# Altium PCB CL-KB-V1.2.pcbdoc (part 3 of 3)
Units mil, origin at the board's own origin, x right, y up, seen from the top; angles counter-clockwise.
Board outline 3269.95 x 5989.25 mil, 2 copper layers (Top Layer, Bottom Layer); 76 components, 86 nets, 398 pads, 855 vias.
Unrouted connection lines stored in the file: 1.
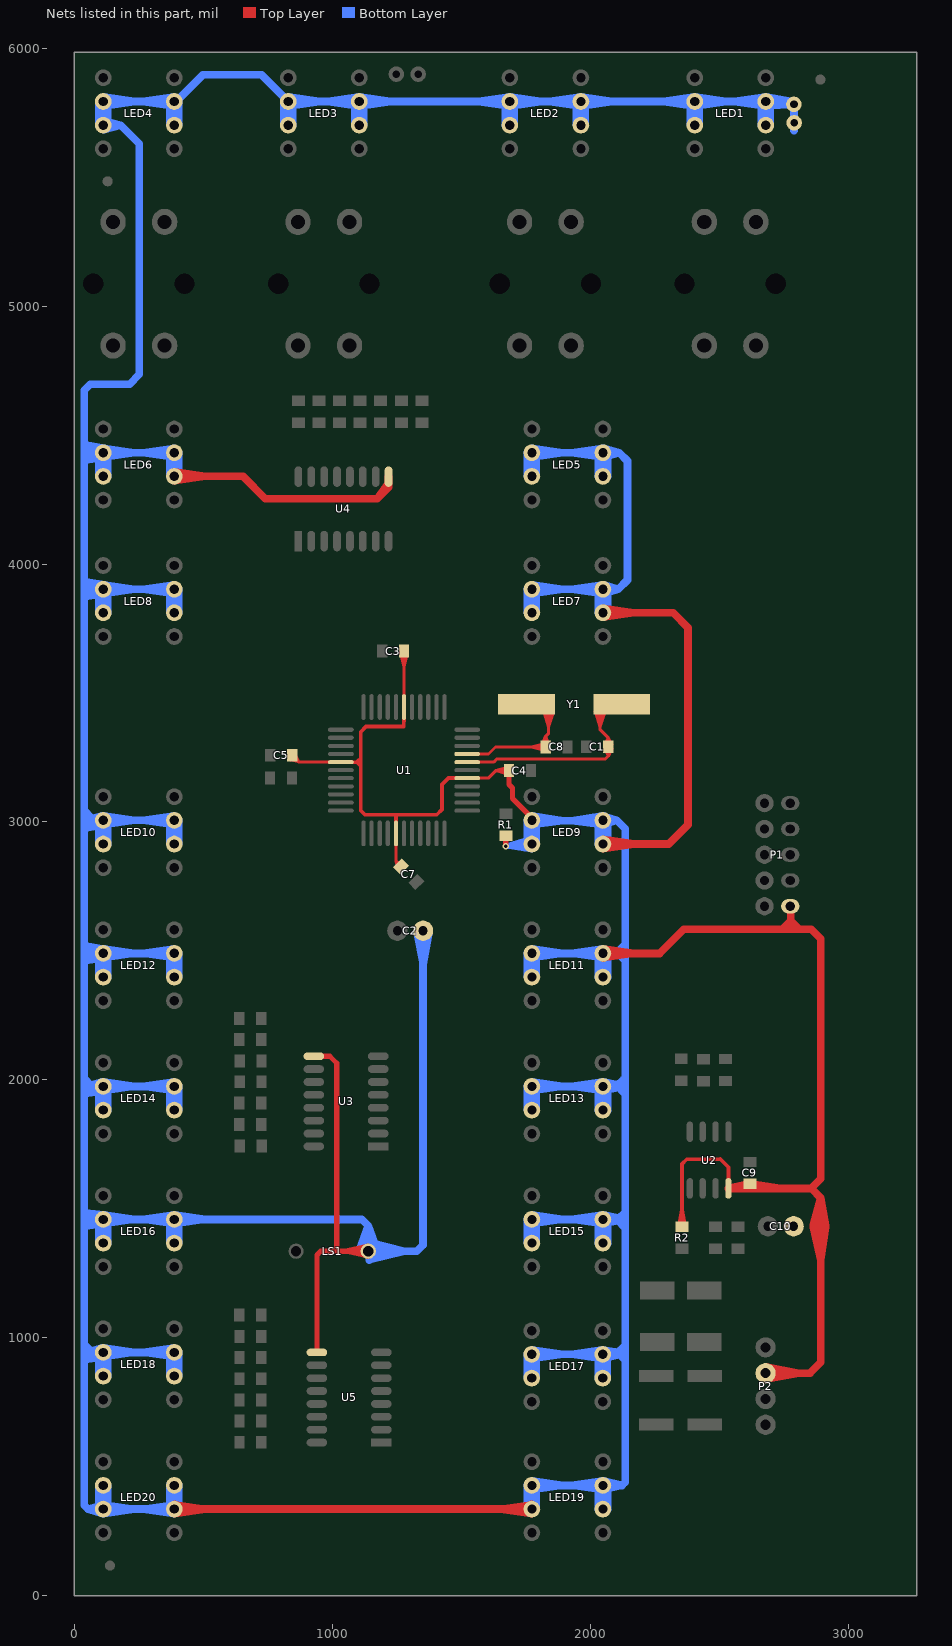
[diagram p3: the nets of this part, all layers, seen from the top]

## Via types
v1: diameter 25, hole 15, Top Layer to Bottom Layer, tented both sides, 855 vias

## Nets (pads, with @x,y where several pads share a name; then routed paths per layer and width w, separated by ;. In a path a pad name is that pad's centre, name@x,y a point inside that pad or via, vN(x,y) a via of type N, cw(c..) or ccw(c..) an arc to the next point about the centre after c; other vN are vias at no path point) (continued)
VCC: C2.1 C3.2 C4.2 C5.1 C7.2 C9.1 C10.1 LED1.A LED2.A LED3.A LED4.A LED5.A LED6.A LED7.A LED8.A LED9.A LED10.A LED11.A LED12.A LED13.A LED14.A LED15.A LED16.A LED17.A LED18.A LED19.A LED20.A LS1.1 P1.2 P2.2 pad.3 pad.4 R1.2 R2.1 U1.5 U1.17 U1.27 U1.38 U2.8 U3.9 U4.9 U5.9 | length 103418.5
  Top Layer w12: C5.1@836.52,3241.59 870,3232 ; C5.1@843,3254 870,3232 ; C5.1@843,3259 870,3232 ; C5.1@853.84,3262.85 870,3232 ; 946,3232 U1.27@990,3232 ; U1.27@1032,3232 870,3232 ; 1246,2870 U1.38@1246,2914 ; U1.38@1246,2956 1246,2846 ; C7.2@1252.81,2820.08 1246,2846 ; C3.2@1263.11,3656.25 1277,3602 ; C7.2@1271.92,2839.19 1246,2846 ; U1.17@1277,3446 C3.2@1277,3663 ; U1.17@1277,3488 1277,3532 ; C3.2@1277,3658 1277,3602 ; C3.2@1290.89,3656.25 1277,3602 ; U1.5@1522,3170 1603.68,3170 ; U1.5@1564,3170 1603.68,3170 ; C4.2@1682.61,3185.13 1632.68,3199 ; C4.2@1682.61,3212.87 1632.68,3199 ; 1246,2846 C7.2@1264.95,2827.05 1246,2846 ; 1603.68,3170 1632.68,3199 ; 1632.68,3199 C4.2@1684.5,3199 1632.68,3199
  Top Layer w15: U1.27@1032,3232 1108,3232 U1.27@1074,3232 ; 1094,3232 1103,3241 ; 1095,3232 1104,3223 ; U1.38@1246,2956 1246,3028 ; U1.38@1246,2998 1246,3028 ; U1.17@1276,3413 1276,3370 ; U1.17@1277,3404 1276,3370 ; U1.5@1480,3170 1449,3170 ; U1.5@1522,3170 1449,3170 ; R2.1@2343.56,1430.2 2356,1494 R2.1@2368.44,1430.2 ; R2.1@2356,1429 2356,1673 2374,1691 2505,1691 ; 2504,1692 2536,1660 ; U2.8@2536,1578 2536,1660 ; U2.8@2536,1606 2536,1660 ; 1246,3028 1126,3028 1109,3045 1109,3349 1130,3370 1276,3370 ; 1246,3028 1404,3028 1424,3048 1424,3145 1449,3170
  Top Layer w20: U3.9@927,2091 989,2091 ; U5.9@938.98,941.73 938.98,1320.02 953.28,1334.33 LS1.1@1138.26,1334.33 1048.73,1334.33 ; U3.9@952,2091 989,2091 ; 1016,1334.33 1016,2064 989,2091 ; LS1.1@1136.13,1314.92 1048.73,1334.33 ; LS1.1@1136.13,1353.74 1048.73,1334.33 ; C4.2@1684.5,3194 1684.5,3145.27 ; C4.2@1684.5,3199 1684.5,3145.27 ; LED9.A@1773.2,3006.17 1773.2,3015.8 1698,3091 1698,3131.77 1684.5,3145.27 ; v1(1672,2906) R1.2@1672,2947 v1(1672,2906)
  Top Layer w30: LED20.A@385.8,333.6 LED19.A@1773.2,333.6 1650.7,333.6 ; LED6.A@385.8,4341.08 651.92,4341.08 739,4254 1172,4254 ; LED20.A@387.05,316.14 508.3,333.6 LED20.A@387.05,351.05 ; LED6.A@387.05,4323.62 508.3,4341.08 LED6.A@387.05,4358.53 ; U4.9@1217,4340 1217,4299 ; LED19.A@1771.95,316.14 1650.7,333.6 ; LED19.A@1771.95,351.05 1650.7,333.6 ; LED11.A@2048.79,2490.03 2269.03,2490.03 2363,2584 2745,2584 ; LED9.A@2048.79,2914.3 2304.3,2914.3 2379,2989 2379,3754 2321.45,3811.55 LED7.A@2048.79,3811.55 ; LED11.A@2050.04,2472.57 2171.29,2490.03 LED11.A@2050.04,2507.48 ; LED9.A@2050.04,2896.85 2171.29,2914.3 LED9.A@2050.04,2931.76 ; LED7.A@2050.04,3794.09 2171.29,3811.55 LED7.A@2050.04,3829 ; C9.1@2614,1595.5 U2.8@2536,1578 2857,1578 ; C9.1@2624,1595.5 2738.5,1578 ; P2.2@2680,861 2852,861 2894,903 2894,1541 ; P2.2@2682.3,836.74 2809.37,861 P2.2@2682.3,885.26 ; 2822,2584 2811,2584 ; 2864.84,1427.78 2894,1301.36 ; 2864.93,1434.79 2894,1541 ; 2913.33,1429.65 2894,1301.36 ; 2913.32,1432.59 2894,1541 ; 1172,4254 U4.9@1217,4315 ; 1172,4254 1217,4299 ; 1217,4299 U4.9@1217,4315 ; 1217,4299 U4.9@1217,4315 ; 2745,2584 2778,2584 ; 2745,2584 2778,2617 ; 2778,2584 2811,2584 ; 2778,2584 2778,2617 ; 2778,2617 P1.2@2776,2673 2778,2671 2778,2617 ; 2778,2617 2811,2584 ; 2811,2584 2857,2584 2894,2547 2894,1615 2857,1578 ; 2857,1578 2894,1541 ; 2894,1301.36 2889,1431 2894,1541
  Bottom Layer w20: 1742.42,2927.37 v1(1672,2906) ; 1744.09,2896.17 v1(1672,2906) ; LED9.A@1744.36,2911.73 v1(1672,2906) ; LED9.A@1768.52,2936.31 v1@1680.05,2906 ; LED9.A@1772.48,2891.82 v1@1680.05,2906 ; v1(1672,2906) 1764.89,2906 LED9.A@1773.2,2914.3 v1@1680.05,2906
  Bottom Layer w30: 37,2004 61,1979 ; 37,3043 61,3018 ; 38,971 62,946 ; LED20.A@92.78,331.93 LED20.A@92.78,423.79 ; LED18.A@92.78,848.07 LED18.A@92.78,939.93 ; LED16.A@92.78,1364.21 LED16.A@92.78,1456.08 ; LED14.A@92.78,1880.35 LED14.A@92.78,1972.22 ; LED12.A@92.78,2396.5 LED12.A@92.78,2488.36 ; LED10.A@92.78,2912.64 LED10.A@92.78,3004.5 ; LED8.A@92.78,3809.88 LED8.A@92.78,3901.74 ; LED6.A@92.78,4339.41 LED6.A@92.78,4431.27 ; LED4.A@92.78,5702.4 LED4.A@92.78,5794.26 ; LED20.A@93.42,338.54 LED20.A@127.62,423.79 ; LED18.A@93.42,854.68 LED18.A@127.62,939.93 ; LED16.A@93.42,1370.82 LED16.A@127.62,1456.08 ; LED14.A@93.42,1886.96 LED14.A@127.62,1972.22 ; LED12.A@93.42,2403.1 LED12.A@127.62,2488.36 ; LED10.A@93.42,2919.24 LED10.A@127.62,3004.5 ; LED8.A@93.42,3816.49 LED8.A@127.62,3901.74 ; LED6.A@93.42,4346.02 LED6.A@127.62,4431.27 ; LED4.A@93.42,5709.01 LED4.A@127.62,5794.26 ; LED6.A@101.31,4417.86 42,4463 ; LED12.A@101.43,2474.88 41,2520 ; LED6.A@101.51,4448.13 42,4404 ; LED10.A@101.6,3021.4 39,2976 ; LED12.A@101.68,2505.31 42,2462 ; LED8.A@101.66,3888.14 43,3931 ; LED14.A@101.82,1989.25 39,1945 ; LED8.A@102,3918.87 38,3875 ; LED18.A@102.05,957.09 39,914 ; LED16.A@102.11,1442.23 41,1484 ; LED16.A@102.11,1473.26 40,1431 ; LED10.A@104.67,3022.77 64,3000 ; LED6.A@104.76,4449.57 67,4428 ; LED6.A@104.83,4416.28 66,4438 ; LED12.A@104.98,2473.32 65,2495 ; LED14.A@105.12,1990.63 64,1969 ; LED12.A@105.1,2506.76 67,2486 ; LED8.A@105.39,3920.24 63,3899 ; LED18.A@105.57,958.48 64,938 ; LED8.A@105.65,3886.51 67,3906 ; LED16.A@105.79,1474.68 65,1455 ; LED16.A@106.34,1440.67 65,1459 ; LED16.A@107.3,1475 65,1459 ; LED6.A@107.38,4415.67 56.06,4432.94 ; LED6.A@107.38,4450.21 56.06,4432.94 ; LED20.A@107.62,316.29 50.9,333.6 ; LED20.A@107.62,350.9 50.9,333.6 ; LED8.A@107.7,3920.73 67,3906 ; LED18.A@107.8,924.27 46.6,941.6 ; LED18.A@107.8,958.93 46.6,941.6 ; LED16.A@107.87,1440.4 65,1455 ; LED14.A@107.86,1956.54 44.88,1973.88 ; LED14.A@107.86,1991.23 44.88,1973.88 ; LED12.A@107.96,2472.67 42.03,2490.03 ; LED12.A@107.96,2507.38 42.03,2490.03 ; LED10.A@108.09,2988.8 37.83,3006.17 ; LED10.A@108.09,3023.54 37.83,3006.17 ; LED8.A@108.07,3886.04 38.41,3903.41 ; LED8.A@108.07,3920.78 38.41,3903.41 ; LED16.A@108.13,1440.37 36.26,1457.74 ; LED16.A@108.13,1475.12 36.26,1457.74 ; LED18.A@108.25,924.21 64,938 ; LED12.A@108.28,2472.63 67,2486 ; LED8.A@108.59,3885.99 63,3899 ; LED6.A@108.65,4415.51 67,4428 ; LED14.A@108.73,1956.45 64,1969 ; LED12.A@108.74,2507.46 65,2495 ; LED6.A@108.74,4450.38 66,4438 ; LED10.A@109.22,2988.69 64,3000 ; LED20.A@111.45,316.14 232.7,333.6 LED20.A@111.45,351.05 ; LED18.A@111.45,924.15 232.7,941.6 LED18.A@111.45,959.06 ; LED16.A@111.45,1440.29 232.7,1457.74 LED16.A@111.45,1475.2 ; LED14.A@111.45,1956.43 232.7,1973.88 LED14.A@111.45,1991.34 ; LED12.A@111.45,2472.57 232.7,2490.03 LED12.A@111.45,2507.48 ; LED10.A@111.45,2988.71 232.7,3006.17 LED10.A@111.45,3023.62 ; LED8.A@111.45,3885.96 232.7,3903.41 LED8.A@111.45,3920.87 ; LED6.A@111.45,4415.48 232.7,4432.94 LED6.A@111.45,4450.39 ; LED4.A@111.45,5778.48 232.7,5795.93 LED4.A@111.45,5813.39 ; LED4.A@112.46,5686.71 177.93,5704.07 ; LED4.A@112.46,5721.42 177.93,5704.07 ; LED16.A@114.43,1474.72 41,1484 ; LED16.A@114.49,1440.77 40,1431 ; LED18.A@114.62,924.67 39,914 ; LED8.A@114.73,3886.51 38,3875 ; LED12.A@114.89,2473.16 42,2462 ; LED8.A@114.85,3920.28 43,3931 ; LED14.A@114.89,1957.02 39,1945 ; LED6.A@115.09,4416.13 42,4404 ; LED10.A@115.16,2989.38 39,2976 ; LED12.A@115.25,2506.78 41,2520 ; LED6.A@115.33,4449.67 42,4463 ; LED20.A@126.99,338.54 LED20.A@92.78,423.79 ; LED18.A@126.99,854.68 LED18.A@92.78,939.93 ; LED16.A@126.99,1370.82 LED16.A@92.78,1456.08 ; LED14.A@126.99,1886.96 LED14.A@92.78,1972.22 ; LED12.A@126.99,2403.1 LED12.A@92.78,2488.36 ; LED10.A@126.99,2919.24 LED10.A@92.78,3004.5 ; LED8.A@126.99,3816.49 LED8.A@92.78,3901.74 ; LED6.A@126.99,4346.02 LED6.A@92.78,4431.27 ; LED4.A@126.99,5709.01 LED4.A@92.78,5794.26 ; LED20.A@127.62,331.93 LED20.A@127.62,423.79 ; LED18.A@127.62,848.07 LED18.A@127.62,939.93 ; LED16.A@127.62,1364.21 LED16.A@127.62,1456.08 ; LED14.A@127.62,1880.35 LED14.A@127.62,1972.22 ; LED12.A@127.62,2396.5 LED12.A@127.62,2488.36 ; LED10.A@127.62,2912.64 LED10.A@127.62,3004.5 ; LED8.A@127.62,3809.88 LED8.A@127.62,3901.74 ; LED6.A@127.62,4339.41 LED6.A@127.62,4431.27 ; LED4.A@127.62,5702.4 LED4.A@127.62,5794.26 ; LED20.A@368.38,423.79 LED20.A@385.8,333.6 ; LED20.A@368.38,427.13 LED20.A@368.38,335.26 ; LED18.A@368.38,939.93 LED18.A@385.8,849.74 ; LED18.A@368.38,943.27 LED18.A@368.38,851.4 ; LED16.A@368.38,1456.08 LED16.A@385.8,1365.88 ; LED16.A@368.38,1459.41 LED16.A@368.38,1367.55 ; LED14.A@368.38,1972.22 LED14.A@385.8,1882.02 ; LED14.A@368.38,1975.55 LED14.A@368.38,1883.69 ; LED12.A@368.38,2488.36 LED12.A@385.8,2398.16 ; LED12.A@368.38,2491.69 LED12.A@368.38,2399.83 ; LED10.A@368.38,3004.5 LED10.A@385.8,2914.3 ; LED10.A@368.38,3007.83 LED10.A@368.38,2915.97 ; LED8.A@368.38,3901.74 LED8.A@385.8,3811.55 ; LED8.A@368.38,3905.08 LED8.A@368.38,3813.22 ; LED6.A@368.38,4431.27 LED6.A@385.8,4341.08 ; LED6.A@368.38,4434.61 LED6.A@368.38,4342.74 ; LED4.A@368.38,5794.26 LED4.A@385.8,5704.07 ; LED4.A@368.38,5797.6 LED4.A@368.38,5705.73 ; LED20.A@369.01,420.52 LED20.A@403.22,335.26 ; LED18.A@369.01,936.66 LED18.A@403.22,851.4 ; LED16.A@369.01,1452.8 LED16.A@403.22,1367.55 ; LED14.A@369.01,1968.94 LED14.A@403.22,1883.69 ; LED12.A@369.01,2485.09 LED12.A@403.22,2399.83 ; LED10.A@369.01,3001.23 LED10.A@403.22,2915.97 ; LED8.A@369.01,3898.47 LED8.A@403.22,3813.22 ; LED6.A@369.01,4428 LED6.A@403.22,4342.74 ; LED4.A@369.01,5790.99 LED4.A@403.22,5705.73 ; LED20.A@384.55,316.14 263.3,333.6 ; LED20.A@384.55,351.05 263.3,333.6 ; LED18.A@384.55,924.15 263.3,941.6 ; LED18.A@384.55,959.06 263.3,941.6 ; LED16.A@384.55,1440.29 263.3,1457.74 ; LED16.A@384.55,1475.2 263.3,1457.74 ; LED14.A@384.55,1956.43 263.3,1973.88 ; LED14.A@384.55,1991.34 263.3,1973.88 ; LED12.A@384.55,2472.57 263.3,2490.03 ; LED12.A@384.55,2507.48 263.3,2490.03 ; LED10.A@384.55,2988.71 263.3,3006.17 ; LED10.A@384.55,3023.62 263.3,3006.17 ; LED8.A@384.55,3885.96 263.3,3903.41 ; LED8.A@384.55,3920.87 263.3,3903.41 ; LED6.A@384.55,4415.48 263.3,4432.94 ; LED6.A@384.55,4450.39 263.3,4432.94 ; LED4.A@384.55,5778.48 263.3,5795.93 ; LED4.A@384.55,5813.39 263.3,5795.93 ; LED16.A@387.05,1440.29 508.3,1457.74 LED16.A@387.05,1475.2 ; LED20.A@402.58,420.52 LED20.A@368.38,335.26 ; LED18.A@402.58,936.66 LED18.A@368.38,851.4 ; LED16.A@402.58,1452.8 LED16.A@368.38,1367.55 ; LED14.A@402.58,1968.94 LED14.A@368.38,1883.69 ; LED12.A@402.58,2485.09 LED12.A@368.38,2399.83 ; LED10.A@402.58,3001.23 LED10.A@368.38,2915.97 ; LED8.A@402.58,3898.47 LED8.A@368.38,3813.22 ; LED6.A@402.58,4428 LED6.A@368.38,4342.74 ; LED4.A@402.58,5790.99 LED4.A@368.38,5705.73 ; LED20.A@403.22,423.79 LED20.A@385.8,333.6 ; LED20.A@403.22,427.13 LED20.A@403.22,335.26 ; LED18.A@403.22,939.93 LED18.A@385.8,849.74 ; LED18.A@403.22,943.27 LED18.A@403.22,851.4 ; LED16.A@403.22,1456.08 LED16.A@385.8,1365.88 ; LED16.A@403.22,1459.41 LED16.A@403.22,1367.55 ; LED14.A@403.22,1972.22 LED14.A@385.8,1882.02 ; LED14.A@403.22,1975.55 LED14.A@403.22,1883.69 ; LED12.A@403.22,2488.36 LED12.A@385.8,2398.16 ; LED12.A@403.22,2491.69 LED12.A@403.22,2399.83 ; LED10.A@403.22,3004.5 LED10.A@385.8,2914.3 ; LED10.A@403.22,3007.83 LED10.A@403.22,2915.97 ; LED8.A@403.22,3901.74 LED8.A@385.8,3811.55 ; LED8.A@403.22,3905.08 LED8.A@403.22,3813.22 ; LED6.A@403.22,4431.27 LED6.A@385.8,4341.08 ; LED6.A@403.22,4434.61 LED6.A@403.22,4342.74 ; LED4.A@403.22,5794.26 LED4.A@385.8,5704.07 ; LED4.A@403.22,5797.6 LED4.A@403.22,5705.73 ; LED3.A@810.5,5702.4 LED3.A@810.5,5794.26 ; LED3.A@811.13,5709.01 LED3.A@845.34,5794.26 ; LED3.A@829.17,5778.48 950.42,5795.93 LED3.A@829.17,5813.39 ; LED3.A@844.71,5709.01 LED3.A@810.5,5794.26 ; LED3.A@845.34,5702.4 LED3.A@845.34,5794.26 ; LED3.A@1086.09,5794.26 LED3.A@1103.51,5704.07 ; LED3.A@1086.09,5797.6 LED3.A@1086.09,5705.73 ; LED3.A@1086.72,5790.99 LED3.A@1120.93,5705.73 ; LED3.A@1102.26,5778.48 981.01,5795.93 LED3.A@1102.26,5813.39 ; LS1.1@1104.57,1340.28 1138.26,1432.74 ; LED3.A@1104.76,5778.48 1226.01,5795.93 LED3.A@1104.76,5813.39 ; LED3.A@1120.3,5790.99 LED3.A@1086.09,5705.73 ; LED3.A@1120.93,5794.26 LED3.A@1103.51,5704.07 ; LED3.A@1120.93,5797.6 LED3.A@1120.93,5705.73 ; LS1.1@1142.46,1300.38 1277.47,1334.33 LS1.1@1142.46,1368.28 ; LS1.1@1171.95,1340.28 1138.26,1432.74 ; C2.1@1326.74,2575.7 1351,2448.63 ; C2.1@1375.26,2575.7 1351,2448.63 ; LED2.A@1670.34,5702.4 LED2.A@1670.34,5794.26 ; LED2.A@1670.97,5709.01 LED2.A@1705.18,5794.26 ; LED2.A@1686.51,5778.48 1565.26,5795.93 LED2.A@1686.51,5813.39 ; LED2.A@1689.01,5778.48 1810.26,5795.93 LED2.A@1689.01,5813.39 ; LED2.A@1704.55,5709.01 LED2.A@1670.34,5794.26 ; LED2.A@1705.18,5702.4 LED2.A@1705.18,5794.26 ; LED17.A@1754.78,932.26 LED17.A@1772.2,842.07 ; LED17.A@1754.78,935.6 LED17.A@1754.78,843.73 ; LED17.A@1755.42,928.99 LED17.A@1789.62,843.73 ; LED19.A@1755.78,423.79 LED19.A@1773.2,333.6 ; LED19.A@1755.78,427.13 LED19.A@1755.78,335.26 ; LED15.A@1755.78,1456.08 LED15.A@1773.2,1365.88 ; LED15.A@1755.78,1459.41 LED15.A@1755.78,1367.55 ; LED13.A@1755.78,1972.22 LED13.A@1773.2,1882.02 ; LED13.A@1755.78,1975.55 LED13.A@1755.78,1883.69 ; LED11.A@1755.78,2488.36 LED11.A@1773.2,2398.16 ; LED11.A@1755.78,2491.69 LED11.A@1755.78,2399.83 ; LED9.A@1755.78,3004.5 LED9.A@1773.2,2914.3 ; LED9.A@1755.78,3007.83 LED9.A@1755.76,2915.76 ; LED7.A@1755.78,3901.74 LED7.A@1773.2,3811.55 ; LED7.A@1755.78,3905.08 LED7.A@1755.78,3813.22 ; LED5.A@1755.78,4431.27 LED5.A@1773.2,4341.08 ; LED5.A@1755.78,4434.61 LED5.A@1755.78,4342.74 ; LED9.A@1755.8,3004.31 LED9.A@1772,2935 ; LED19.A@1756.41,420.52 LED19.A@1790.62,335.26 ; LED15.A@1756.41,1452.8 LED15.A@1790.62,1367.55 ; LED13.A@1756.41,1968.94 LED13.A@1790.62,1883.69 ; LED11.A@1756.41,2485.09 LED11.A@1790.62,2399.83 ; LED9.A@1756.41,3001.22 LED9.A@1790.59,2916.22 ; LED7.A@1756.41,3898.47 LED7.A@1790.62,3813.22 ; LED5.A@1756.41,4428 LED5.A@1790.62,4342.74 ; LED17.A@1773.45,916.48 1894.7,933.93 LED17.A@1773.45,951.39 ; LED9.A@1774.28,2988.7 1895.71,3004.97 ; LED19.A@1774.45,408 1895.7,425.46 LED19.A@1774.45,442.91 ; LED15.A@1774.45,1440.29 1895.7,1457.74 LED15.A@1774.45,1475.2 ; LED13.A@1774.45,1956.43 1895.7,1973.88 LED13.A@1774.45,1991.34 ; LED11.A@1774.45,2472.57 1895.7,2490.03 LED11.A@1774.45,2507.48 ; LED7.A@1774.45,3885.96 1895.7,3903.41 LED7.A@1774.45,3920.87 ; LED5.A@1774.45,4415.48 1895.7,4432.94 LED5.A@1774.45,4450.39 ; LED9.A@1774.62,3023.61 1895.71,3004.97 ; LED17.A@1788.99,928.99 LED17.A@1754.78,843.73 ; LED17.A@1789.62,932.26 LED17.A@1772.2,842.07 ; LED17.A@1789.62,935.6 LED17.A@1789.62,843.73 ; LED19.A@1789.98,420.52 LED19.A@1755.78,335.26 ; LED15.A@1789.98,1452.8 LED15.A@1755.78,1367.55 ; LED13.A@1789.98,1968.94 LED13.A@1755.78,1883.69 ; LED11.A@1789.98,2485.09 LED11.A@1755.78,2399.83 ; LED9.A@1789.99,3001.23 LED9.A@1755.76,2915.76 ; LED7.A@1789.98,3898.47 LED7.A@1755.78,3813.22 ; LED5.A@1789.98,4428 LED5.A@1755.78,4342.74 ; LED9.A@1790.52,3003.72 LED9.A@1772,2935 ; LED19.A@1790.62,423.79 LED19.A@1773.2,333.6 ; LED19.A@1790.62,427.13 LED19.A@1790.62,335.26 ; LED15.A@1790.62,1456.08 LED15.A@1773.2,1365.88 ; LED15.A@1790.62,1459.41 LED15.A@1790.62,1367.55 ; LED13.A@1790.62,1972.22 LED13.A@1773.2,1882.02 ; LED13.A@1790.62,1975.55 LED13.A@1790.62,1883.69 ; LED11.A@1790.62,2488.36 LED11.A@1773.2,2398.16 ; LED11.A@1790.62,2491.69 LED11.A@1790.62,2399.83 ; LED9.A@1790.62,3004.5 LED9.A@1773.2,2914.3 ; LED9.A@1790.62,3007.83 LED9.A@1790.59,2916.22 ; LED7.A@1790.62,3901.74 LED7.A@1773.2,3811.55 ; LED7.A@1790.62,3905.08 LED7.A@1790.62,3813.22 ; LED5.A@1790.62,4431.27 LED5.A@1773.2,4341.08 ; LED5.A@1790.62,4434.61 LED5.A@1790.62,4342.74 ; LED2.A@1945.93,5794.26 LED2.A@1963.35,5704.07 ; LED2.A@1945.92,5794.38 LED2.A@1963.35,5697.35 ; LED2.A@1945.93,5797.6 LED2.A@1945.93,5705.73 ; LED2.A@1946.57,5790.99 LED2.A@1980.78,5705.73 ; LED2.A@1962.1,5778.48 1840.85,5795.93 LED2.A@1962.1,5813.39 ; LED2.A@1964.6,5778.48 2085.85,5795.93 LED2.A@1964.6,5813.39 ; LED2.A@1980.14,5790.99 LED2.A@1945.93,5705.73 ; LED2.A@1980.78,5794.26 LED2.A@1963.35,5704.07 ; LED2.A@1980.79,5794.38 LED2.A@1963.35,5697.35 ; LED2.A@1980.78,5797.6 LED2.A@1980.78,5705.73 ; LED17.A@2030.38,840.4 LED17.A@2030.38,932.26 ; LED17.A@2031.01,847.01 LED17.A@2065.22,932.26 ; LED19.A@2031.37,331.93 LED19.A@2031.37,423.79 ; LED15.A@2031.37,1364.21 LED15.A@2031.37,1456.08 ; LED13.A@2031.37,1880.35 LED13.A@2031.37,1972.22 ; LED11.A@2031.37,2396.5 LED11.A@2031.37,2488.36 ; LED9.A@2031.37,2912.64 LED9.A@2031.37,3004.5 ; LED7.A@2031.37,3809.88 LED7.A@2031.37,3901.74 ; LED5.A@2031.37,4339.41 LED5.A@2031.37,4431.27 ; LED19.A@2032,338.54 LED19.A@2066.21,423.79 ; LED15.A@2032,1370.82 LED15.A@2066.21,1456.08 ; LED13.A@2032,1886.96 LED13.A@2066.21,1972.22 ; LED11.A@2032,2403.1 LED11.A@2066.21,2488.36 ; LED9.A@2032,2919.24 LED9.A@2066.21,3004.5 ; LED7.A@2032,3816.49 LED7.A@2066.21,3901.74 ; LED5.A@2032,4346.02 LED5.A@2066.21,4431.27 ; LED17.A@2046.55,916.48 1925.3,933.93 ; LED17.A@2046.55,951.39 1925.3,933.93 ; LED9.A@2047.37,3023.61 1926.27,3004.97 ; LED19.A@2047.54,408 1926.29,425.46 ; LED19.A@2047.54,442.91 1926.29,425.46 ; LED15.A@2047.54,1440.29 1926.29,1457.74 ; LED15.A@2047.54,1475.2 1926.29,1457.74 ; LED13.A@2047.54,1956.43 1926.29,1973.88 ; LED13.A@2047.54,1991.34 1926.29,1973.88 ; LED11.A@2047.54,2472.57 1926.29,2490.03 ; LED11.A@2047.54,2507.48 1926.29,2490.03 ; LED7.A@2047.54,3885.96 1926.29,3903.41 ; LED7.A@2047.54,3920.87 1926.29,3903.41 ; LED5.A@2047.54,4415.48 1926.29,4432.94 ; LED5.A@2047.54,4450.39 1926.29,4432.94 ; LED9.A@2047.59,3004.97 LED9.A@1772,3004.97 ; LED9.A@2047.71,2988.7 1926.27,3004.97 ; LED17.A@2048.57,951.41 2131,939 ; LED15.A@2050.51,1475.16 2135,1458 ; LED13.A@2050.54,1991.3 2135,1974 ; LED13.A@2050.59,1956.48 2135,1974 ; LED15.A@2050.62,1440.34 2135,1458 ; LED11.A@2050.63,2472.62 2131.97,2490.03 ; LED11.A@2050.63,2507.43 2131.97,2490.03 ; LED17.A@2050.69,916.67 2131,939 ; LED19.A@2050.86,408.08 2122.54,425.46 ; LED19.A@2050.86,442.84 2122.54,425.46 ; LED5.A@2051.21,4415.61 2111.94,4432.94 ; LED5.A@2051.21,4450.27 2111.94,4432.94 ; LED7.A@2051.36,3886.1 2108.41,3903.41 ; LED7.A@2051.36,3920.72 2108.41,3903.41 ; LED9.A@2051.62,2988.9 2102.83,3006.17 ; LED9.A@2051.62,3023.44 2102.83,3006.17 ; LED17.A@2064.58,847.01 LED17.A@2030.38,932.26 ; LED17.A@2065.22,840.4 LED17.A@2065.22,932.26 ; LED19.A@2065.58,338.54 LED19.A@2031.37,423.79 ; LED15.A@2065.58,1370.82 LED15.A@2031.37,1456.08 ; LED13.A@2065.58,1886.96 LED13.A@2031.37,1972.22 ; LED11.A@2065.58,2403.1 LED11.A@2031.37,2488.36 ; LED9.A@2065.58,2919.24 LED9.A@2031.37,3004.5 ; LED7.A@2065.58,3816.49 LED7.A@2031.37,3901.74 ; LED5.A@2065.58,4346.02 LED5.A@2031.37,4431.27 ; LED19.A@2066.21,331.93 LED19.A@2066.21,423.79 ; LED15.A@2066.21,1364.21 LED15.A@2066.21,1456.08 ; LED13.A@2066.21,1880.35 LED13.A@2066.21,1972.22 ; LED11.A@2066.21,2396.5 LED11.A@2066.21,2488.36 ; LED9.A@2066.21,2912.64 LED9.A@2066.21,3004.5 ; LED7.A@2066.21,3809.88 LED7.A@2066.21,3901.74 ; LED5.A@2066.21,4339.41 LED5.A@2066.21,4431.27 ; 2103,2493.03 2128,2517.03 ; 2104,1977 2129,2001 ; 2105,939 2130,963 ; 2106,1974 2130,1949 ; 2106,2493.03 2130,2468.03 ; 2107,939 2132,915 ; 2108,1453 2132,1428 ; 2110,1461 2135,1485 ; 2135,935 2131,939 ; LED1.A@2388.06,5794.26 LED1.A@2405.48,5704.07 ; LED1.A@2388.06,5797.6 LED1.A@2388.06,5705.73 ; LED1.A@2388.69,5790.99 LED1.A@2422.9,5705.73 ; LED1.A@2404.23,5778.48 2282.98,5795.93 LED1.A@2404.23,5813.39 ; LED1.A@2406.73,5778.48 2527.98,5795.93 LED1.A@2406.73,5813.39 ; LED1.A@2422.27,5790.99 LED1.A@2388.06,5705.73 ; LED1.A@2422.9,5794.26 LED1.A@2405.48,5704.07 ; LED1.A@2422.9,5797.6 LED1.A@2422.9,5705.73 ; LED1.A@2663.65,5702.4 LED1.A@2663.65,5794.26 ; LED1.A@2664.28,5709.01 LED1.A@2698.49,5794.26 ; LED1.A@2679.82,5778.48 2558.57,5795.93 LED1.A@2679.82,5813.39 ; LED1.A@2697.86,5709.01 LED1.A@2663.65,5794.26 ; LED1.A@2698.49,5702.4 LED1.A@2698.49,5794.26 ; 36,931 46.6,941.6 ; 36,931 36,348.5 50.9,333.6 ; 36,931 36,1965 ; 36,1965 44.88,1973.88 ; 36,1965 36,2484 ; 36,2484 42.03,2490.03 ; 36,2484 36,3008 ; 36,3008 37.83,3006.17 ; 36,3008 36,3901 ; 36,3901 38.41,3903.41 ; 36,3901 36,4453 ; 36,4453 56.06,4432.94 ; 36,4453 36,4675 60,4699 212,4699 250,4737 250,5632 177.93,5704.07 ; 36.26,1457.74 LED16.A@110.2,1457.74 ; 36.26,1457.74 1113.26,1457.74 1138.26,1432.74 ; 37.83,3006.17 LED10.A@110.2,3006.17 ; 37.83,3006.17 LED10.A@385.8,3006.17 ; 38,3875 LED8.A@110.2,3903.41 ; 38,3875 63,3899 ; 38.41,3903.41 LED8.A@110.2,3903.41 ; 38.41,3903.41 LED8.A@385.8,3903.41 ; 39,914 LED18.A@110.2,941.6 ; 39,914 64,938 ; 39,1945 LED14.A@110.2,1973.88 ; 39,1945 64,1969 ; 39,2976 LED10.A@110.2,3006.17 ; 39,2976 64,3000 ; 40,1431 LED16.A@110.2,1457.74 ; 40,1431 65,1455 ; 41,1484 LED16.A@110.2,1457.74 ; 41,1484 65,1459 ; 41,2520 LED12.A@110.2,2490.03 ; 41,2520 65,2495 ; 42,2462 LED12.A@110.2,2490.03 ; 42,2462 67,2486 ; 42.03,2490.03 LED12.A@110.2,2490.03 ; 42.03,2490.03 LED12.A@385.8,2490.03 ; 42,4404 LED6.A@110.2,4432.94 ; 42,4404 67,4428 ; 42,4463 LED6.A@110.2,4432.94 ; 42,4463 66,4438 ; 43,3931 LED8.A@110.2,3903.41 ; 43,3931 67,3906 ; 44.88,1973.88 LED14.A@110.2,1973.88 ; 44.88,1973.88 LED14.A@385.8,1973.88 ; 46.6,941.6 LED18.A@110.2,941.6 ; 46.6,941.6 LED18.A@385.8,941.6 ; 50.9,333.6 LED20.A@110.2,333.6 ; 50.9,333.6 LED20.A@110.2,333.6 ; 56.06,4432.94 LED6.A@110.2,4432.94 ; 56.06,4432.94 LED6.A@385.8,4432.94 ; 63,3899 LED8.A@110.2,3903.41 ; 64,938 LED18.A@110.2,941.6 ; 64,1969 LED14.A@110.2,1973.88 ; 64,3000 LED10.A@110.2,3006.17 ; 65,1455 LED16.A@110.2,1457.74 ; 65,1459 LED16.A@110.2,1457.74 ; 65,2495 LED12.A@110.2,2490.03 ; 66,4438 LED6.A@110.2,4432.94 ; 67,2486 LED12.A@110.2,2490.03 ; 67,3906 LED8.A@110.2,3903.41 ; 67,4428 LED6.A@110.2,4432.94 ; LED20.A@92.78,423.79 LED20.A@110.2,333.6 ; LED20.A@92.78,423.79 LED20.A@110.2,333.6 ; LED18.A@92.78,939.93 LED18.A@110.2,849.74 ; LED18.A@92.78,939.93 LED18.A@110.2,849.74 ; LED16.A@92.78,1456.08 LED16.A@110.2,1365.88 ; LED16.A@92.78,1456.08 LED16.A@110.2,1365.88 ; LED14.A@92.78,1972.22 LED14.A@110.2,1882.02 ; LED14.A@92.78,1972.22 LED14.A@110.2,1882.02 ; LED12.A@92.78,2488.36 LED12.A@110.2,2398.16 ; LED12.A@92.78,2488.36 LED12.A@110.2,2398.16 ; LED10.A@92.78,3004.5 LED10.A@110.2,2914.3 ; LED10.A@92.78,3004.5 LED10.A@110.2,2914.3 ; LED8.A@92.78,3901.74 LED8.A@110.2,3811.55 ; LED8.A@92.78,3901.74 LED8.A@110.2,3811.55 ; LED6.A@92.78,4431.27 LED6.A@110.2,4341.08 ; LED6.A@92.78,4431.27 LED6.A@110.2,4341.08 ; LED4.A@92.78,5794.26 LED4.A@110.2,5704.07 ; LED4.A@92.78,5794.26 LED4.A@110.2,5704.07 ; LED20.A@110.2,333.6 LED20.A@110.2,425.46 ; LED20.A@110.2,333.6 LED20.A@127.62,423.79 ; LED20.A@110.2,333.6 LED20.A@110.2,425.46 ; LED20.A@110.2,333.6 LED20.A@385.8,333.6 ; LED20.A@110.2,425.46 127.62,335.26 LED20.A@110.2,425.46 ; LED20.A@110.2,425.46 92.78,335.26 LED20.A@110.2,425.46 ; LED18.A@110.2,849.74 LED18.A@110.2,941.6 ; LED18.A@110.2,849.74 LED18.A@127.62,939.93 ; LED18.A@110.2,849.74 LED18.A@110.2,941.6 ; LED18.A@110.2,941.6 127.62,851.4 LED18.A@110.2,941.6 ; LED18.A@110.2,941.6 92.78,851.4 LED18.A@110.2,941.6 ; LED16.A@110.2,1365.88 LED16.A@110.2,1457.74 ; LED16.A@110.2,1365.88 LED16.A@127.62,1456.08 ; LED16.A@110.2,1365.88 LED16.A@110.2,1457.74 ; LED16.A@110.2,1457.74 127.62,1367.55 LED16.A@110.2,1457.74 ; LED16.A@110.2,1457.74 92.78,1367.55 LED16.A@110.2,1457.74 ; LED14.A@110.2,1882.02 LED14.A@110.2,1973.88 ; LED14.A@110.2,1882.02 LED14.A@127.62,1972.22 ; LED14.A@110.2,1882.02 LED14.A@110.2,1973.88 ; LED14.A@110.2,1973.88 127.62,1883.69 LED14.A@110.2,1973.88 ; LED14.A@110.2,1973.88 92.78,1883.69 LED14.A@110.2,1973.88 ; LED12.A@110.2,2398.16 LED12.A@110.2,2490.03 ; LED12.A@110.2,2398.16 LED12.A@127.62,2488.36 ; LED12.A@110.2,2398.16 LED12.A@110.2,2490.03 ; LED12.A@110.2,2490.03 127.62,2399.83 LED12.A@110.2,2490.03 ; LED12.A@110.2,2490.03 92.78,2399.83 LED12.A@110.2,2490.03 ; LED10.A@110.2,2914.3 LED10.A@110.2,3006.17 ; LED10.A@110.2,2914.3 LED10.A@127.62,3004.5 ; LED10.A@110.2,2914.3 LED10.A@110.2,3006.17 ; LED10.A@110.2,3006.17 127.62,2915.97 LED10.A@110.2,3006.17 ; LED10.A@110.2,3006.17 92.78,2915.97 LED10.A@110.2,3006.17 ; LED8.A@110.2,3811.55 LED8.A@110.2,3903.41 ; LED8.A@110.2,3811.55 LED8.A@127.62,3901.74 ; LED8.A@110.2,3811.55 LED8.A@110.2,3903.41 ; LED8.A@110.2,3903.41 127.62,3813.22 LED8.A@110.2,3903.41 ; LED8.A@110.2,3903.41 92.78,3813.22 LED8.A@110.2,3903.41 ; LED6.A@110.2,4341.08 LED6.A@110.2,4432.94 ; LED6.A@110.2,4341.08 LED6.A@127.62,4431.27 ; LED6.A@110.2,4341.08 LED6.A@110.2,4432.94 ; LED6.A@110.2,4432.94 127.62,4342.74 LED6.A@110.2,4432.94 ; LED6.A@110.2,4432.94 92.78,4342.74 LED6.A@110.2,4432.94 ; LED4.A@110.2,5704.07 LED4.A@110.2,5795.93 ; LED4.A@110.2,5704.07 LED4.A@127.62,5794.26 ; LED4.A@110.2,5704.07 LED4.A@110.2,5795.93 ; LED4.A@110.2,5704.07 177.93,5704.07 ; LED4.A@110.2,5795.93 127.62,5705.73 LED4.A@110.2,5795.93 ; LED4.A@110.2,5795.93 92.78,5705.73 LED4.A@110.2,5795.93 ; LED4.A@110.2,5795.93 392.93,5795.93 497,5900 723.85,5900 LED3.A@827.92,5795.93 ; 263.3,333.6 LED20.A@385.8,333.6 ; 263.3,941.6 LED18.A@385.8,941.6 ; 263.3,1457.74 LED16.A@385.8,1457.74 ; 263.3,1973.88 LED14.A@385.8,1973.88 ; 263.3,2490.03 LED12.A@385.8,2490.03 ; 263.3,3006.17 LED10.A@385.8,3006.17 ; 263.3,3903.41 LED8.A@385.8,3903.41 ; 263.3,4432.94 LED6.A@385.8,4432.94 ; 263.3,5795.93 LED4.A@385.8,5795.93 ; LED20.A@368.38,335.26 LED20.A@385.8,425.46 ; LED20.A@368.38,335.26 LED20.A@385.8,425.46 ; LED18.A@368.38,851.4 LED18.A@385.8,941.6 ; LED18.A@368.38,851.4 LED18.A@385.8,941.6 ; LED16.A@368.38,1367.55 LED16.A@385.8,1457.74 ; LED16.A@368.38,1367.55 LED16.A@385.8,1457.74 ; LED14.A@368.38,1883.69 LED14.A@385.8,1973.88 ; LED14.A@368.38,1883.69 LED14.A@385.8,1973.88 ; LED12.A@368.38,2399.83 LED12.A@385.8,2490.03 ; LED12.A@368.38,2399.83 LED12.A@385.8,2490.03 ; LED10.A@368.38,2915.97 LED10.A@385.8,3006.17 ; LED10.A@368.38,2915.97 LED10.A@385.8,3006.17 ; LED8.A@368.38,3813.22 LED8.A@385.8,3903.41 ; LED8.A@368.38,3813.22 LED8.A@385.8,3903.41 ; LED6.A@368.38,4342.74 LED6.A@385.8,4432.94 ; LED6.A@368.38,4342.74 LED6.A@385.8,4432.94 ; LED4.A@368.38,5705.73 LED4.A@385.8,5795.93 ; LED4.A@368.38,5705.73 LED4.A@385.8,5795.93 ; LED20.A@385.8,333.6 LED20.A@385.8,425.46 ; LED20.A@385.8,333.6 LED20.A@385.8,425.46 ; LED20.A@385.8,425.46 LED20.A@403.22,335.26 ; LED18.A@385.8,849.74 LED18.A@385.8,941.6 ; LED18.A@385.8,849.74 LED18.A@385.8,941.6 ; LED18.A@385.8,941.6 LED18.A@403.22,851.4 ; LED16.A@385.8,1365.88 LED16.A@385.8,1457.74 ; LED16.A@385.8,1365.88 LED16.A@385.8,1457.74 ; LED16.A@385.8,1457.74 LED16.A@403.22,1367.55 ; LED14.A@385.8,1882.02 LED14.A@385.8,1973.88 ; LED14.A@385.8,1882.02 LED14.A@385.8,1973.88 ; LED14.A@385.8,1973.88 LED14.A@403.22,1883.69 ; LED12.A@385.8,2398.16 LED12.A@385.8,2490.03 ; LED12.A@385.8,2398.16 LED12.A@385.8,2490.03 ; LED12.A@385.8,2490.03 LED12.A@403.22,2399.83 ; LED10.A@385.8,2914.3 LED10.A@385.8,3006.17 ; LED10.A@385.8,2914.3 LED10.A@385.8,3006.17 ; LED10.A@385.8,3006.17 LED10.A@403.22,2915.97 ; LED8.A@385.8,3811.55 LED8.A@385.8,3903.41 ; LED8.A@385.8,3811.55 LED8.A@385.8,3903.41 ; LED8.A@385.8,3903.41 LED8.A@403.22,3813.22 ; LED6.A@385.8,4341.08 LED6.A@385.8,4432.94 ; LED6.A@385.8,4341.08 LED6.A@385.8,4432.94 ; LED6.A@385.8,4432.94 LED6.A@403.22,4342.74 ; LED4.A@385.8,5704.07 LED4.A@385.8,5795.93 ; LED4.A@385.8,5704.07 LED4.A@385.8,5795.93 ; LED4.A@385.8,5795.93 LED4.A@403.22,5705.73 ; LED3.A@810.5,5794.26 LED3.A@827.92,5704.07 ; LED3.A@810.5,5794.26 LED3.A@827.92,5704.07 ; LED3.A@827.92,5704.07 LED3.A@827.92,5795.93 ; LED3.A@827.92,5704.07 LED3.A@845.34,5794.26 ; LED3.A@827.92,5704.07 LED3.A@827.92,5795.93 ; LED3.A@827.92,5795.93 845.34,5705.73 LED3.A@827.92,5795.93 ; LED3.A@827.92,5795.93 810.5,5705.73 LED3.A@827.92,5795.93 ; LED3.A@827.92,5795.93 LED3.A@1103.51,5795.93 ; LED3.A@1086.09,5705.73 LED3.A@1103.51,5795.93 ; LED3.A@1086.09,5705.73 LED3.A@1103.51,5795.93 ; LED3.A@1103.51,5704.07 LED3.A@1103.51,5795.93 ; LED3.A@1103.51,5704.07 LED3.A@1103.51,5795.93 ; LED3.A@1103.51,5795.93 LED3.A@1120.93,5705.73 ; LED3.A@1103.51,5795.93 LED2.A@1687.76,5795.93 ; 1138.26,1432.74 LS1.1@1138.26,1334.33 1326.67,1334.33 1351,1358.66 C2.1@1351,2578 1351,2448.63 ; LED2.A@1670.34,5794.26 LED2.A@1687.76,5704.07 ; LED2.A@1670.34,5794.26 LED2.A@1687.76,5704.07 ; LED2.A@1687.76,5704.07 LED2.A@1687.76,5795.93 ; LED2.A@1687.76,5704.07 LED2.A@1705.18,5794.26 ; LED2.A@1687.76,5704.07 LED2.A@1687.76,5795.93 ; LED2.A@1687.76,5795.93 1705.18,5705.73 LED2.A@1687.76,5795.93 ; LED2.A@1687.76,5795.93 1670.34,5705.73 LED2.A@1687.76,5795.93 ; LED2.A@1687.76,5795.93 LED2.A@1963.35,5795.93 ; LED17.A@1754.78,843.73 LED17.A@1772.2,933.93 ; LED17.A@1754.78,843.73 LED17.A@1772.2,933.93 ; LED19.A@1755.78,335.26 LED19.A@1773.2,425.46 ; LED19.A@1755.78,335.26 LED19.A@1773.2,425.46 ; LED15.A@1755.78,1367.55 LED15.A@1773.2,1457.74 ; LED15.A@1755.78,1367.55 LED15.A@1773.2,1457.74 ; LED13.A@1755.78,1883.69 LED13.A@1773.2,1973.88 ; LED13.A@1755.78,1883.69 LED13.A@1773.2,1973.88 ; LED11.A@1755.78,2399.83 LED11.A@1773.2,2490.03 ; LED11.A@1755.78,2399.83 LED11.A@1773.2,2490.03 ; LED9.A@1755.76,2915.76 LED9.A@1773.2,3006.17 ; LED9.A@1755.76,2915.76 LED9.A@1772,3004.97 ; LED7.A@1755.78,3813.22 LED7.A@1773.2,3903.41 ; LED7.A@1755.78,3813.22 LED7.A@1773.2,3903.41 ; LED5.A@1755.78,4342.74 LED5.A@1773.2,4432.94 ; LED5.A@1755.78,4342.74 LED5.A@1773.2,4432.94 ; LED9.A@1772,2935 LED9.A@1773.2,3006.17 ; LED9.A@1772,2935 LED9.A@1772,3004.97 ; LED9.A@1772,3004.97 LED9.A@1773.2,2914.3 ; LED9.A@1772,3004.97 LED9.A@1790.59,2916.22 ; LED17.A@1772.2,842.07 LED17.A@1772.2,933.93 ; LED17.A@1772.2,842.07 LED17.A@1772.2,933.93 ; LED17.A@1772.2,933.93 LED17.A@1789.62,843.73 ; LED17.A@1772.2,933.93 LED17.A@2047.8,933.93 ; LED19.A@1773.2,333.6 LED19.A@1773.2,425.46 ; LED19.A@1773.2,333.6 LED19.A@1773.2,425.46 ; LED19.A@1773.2,425.46 LED19.A@1790.62,335.26 ; LED19.A@1773.2,425.46 2122.54,425.46 ; LED15.A@1773.2,1365.88 LED15.A@1773.2,1457.74 ; LED15.A@1773.2,1365.88 LED15.A@1773.2,1457.74 ; LED15.A@1773.2,1457.74 LED15.A@1790.62,1367.55 ; LED15.A@1773.2,1457.74 LED15.A@2048.79,1457.74 ; LED13.A@1773.2,1882.02 LED13.A@1773.2,1973.88 ; LED13.A@1773.2,1882.02 LED13.A@1773.2,1973.88 ; LED13.A@1773.2,1973.88 LED13.A@1790.62,1883.69 ; LED13.A@1773.2,1973.88 LED13.A@2048.79,1973.88 ; LED11.A@1773.2,2398.16 LED11.A@1773.2,2490.03 ; LED11.A@1773.2,2398.16 LED11.A@1773.2,2490.03 ; LED11.A@1773.2,2490.03 LED11.A@1790.62,2399.83 ; LED11.A@1773.2,2490.03 2131.97,2490.03 ; LED9.A@1773.2,2914.3 LED9.A@1773.2,3006.17 ; LED9.A@1773.2,3006.17 1895.71,3004.97 ; LED9.A@1773.2,3006.17 LED9.A@1790.59,2916.22 ; LED7.A@1773.2,3811.55 LED7.A@1773.2,3903.41 ; LED7.A@1773.2,3811.55 LED7.A@1773.2,3903.41 ; LED7.A@1773.2,3903.41 LED7.A@1790.62,3813.22 ; LED7.A@1773.2,3903.41 2108.41,3903.41 ; LED5.A@1773.2,4341.08 LED5.A@1773.2,4432.94 ; LED5.A@1773.2,4341.08 LED5.A@1773.2,4432.94 ; LED5.A@1773.2,4432.94 LED5.A@1790.62,4342.74 ; LED5.A@1773.2,4432.94 2111.94,4432.94 ; 1925.3,933.93 LED17.A@2047.8,933.93 ; 1926.29,425.46 LED19.A@2048.79,425.46 ; 1926.29,1457.74 LED15.A@2048.79,1457.74 ; 1926.29,1973.88 LED13.A@2048.79,1973.88 ; 1926.29,2490.03 LED11.A@2048.79,2490.03 ; 1926.27,3004.97 LED9.A@2048.79,3006.17 ; 1926.29,3903.41 LED7.A@2048.79,3903.41 ; 1926.29,4432.94 LED5.A@2048.79,4432.94 ; LED2.A@1945.93,5705.73 LED2.A@1963.35,5795.93 ; LED2.A@1945.93,5705.73 LED2.A@1963.35,5795.93 ; LED2.A@1963.35,5697.35 LED2.A@1963.35,5795.93 ; LED2.A@1963.35,5697.35 LED2.A@1963.35,5795.93 ; LED2.A@1963.35,5704.07 LED2.A@1963.35,5795.93 ; LED2.A@1963.35,5704.07 LED2.A@1963.35,5795.93 ; LED2.A@1963.35,5795.93 LED2.A@1980.78,5705.73 ; LED2.A@1963.35,5795.93 LED1.A@2405.48,5795.93 ; LED17.A@2030.38,932.26 LED17.A@2047.8,842.07 ; LED17.A@2030.38,932.26 LED17.A@2047.8,842.07 ; LED19.A@2031.37,423.79 LED19.A@2048.79,333.6 ; LED19.A@2031.37,423.79 LED19.A@2048.79,333.6 ; LED15.A@2031.37,1456.08 LED15.A@2048.79,1365.88 ; LED15.A@2031.37,1456.08 LED15.A@2048.79,1365.88 ; LED13.A@2031.37,1972.22 LED13.A@2048.79,1882.02 ; LED13.A@2031.37,1972.22 LED13.A@2048.79,1882.02 ; LED11.A@2031.37,2488.36 LED11.A@2048.79,2398.16 ; LED11.A@2031.37,2488.36 LED11.A@2048.79,2398.16 ; LED9.A@2031.37,3004.5 LED9.A@2048.79,2914.3 ; LED9.A@2031.37,3004.5 LED9.A@2048.79,2914.3 ; LED7.A@2031.37,3901.74 LED7.A@2048.79,3811.55 ; LED7.A@2031.37,3901.74 LED7.A@2048.79,3811.55 ; LED5.A@2031.37,4431.27 LED5.A@2048.79,4341.08 ; LED5.A@2031.37,4431.27 LED5.A@2048.79,4341.08 ; LED17.A@2047.8,842.07 LED17.A@2047.8,933.93 ; LED17.A@2047.8,842.07 LED17.A@2065.22,932.26 ; LED17.A@2047.8,842.07 LED17.A@2047.8,933.93 ; LED17.A@2047.8,933.93 2065.22,843.73 LED17.A@2047.8,933.93 ; LED17.A@2047.8,933.93 2030.38,843.73 LED17.A@2047.8,933.93 ; LED17.A@2047.8,933.93 2131,939 ; LED17.A@2047.8,933.93 2052.86,939 2131,939 ; LED19.A@2048.79,333.6 LED19.A@2048.79,425.46 ; LED19.A@2048.79,333.6 LED19.A@2066.21,423.79 ; LED19.A@2048.79,333.6 LED19.A@2048.79,425.46 ; LED19.A@2048.79,425.46 2066.21,335.26 LED19.A@2048.79,425.46 ; LED19.A@2048.79,425.46 2031.37,335.26 LED19.A@2048.79,425.46 ; LED15.A@2048.79,1365.88 LED15.A@2048.79,1457.74 ; LED15.A@2048.79,1365.88 LED15.A@2066.21,1456.08 ; LED15.A@2048.79,1365.88 LED15.A@2048.79,1457.74 ; LED15.A@2048.79,1457.74 2066.21,1367.55 LED15.A@2048.79,1457.74 ; LED15.A@2048.79,1457.74 2031.37,1367.55 LED15.A@2048.79,1457.74 ; LED15.A@2048.79,1457.74 2135,1458 ; LED15.A@2048.79,1457.74 2049.05,1458 2135,1458 ; LED13.A@2048.79,1882.02 LED13.A@2048.79,1973.88 ; LED13.A@2048.79,1882.02 LED13.A@2066.21,1972.22 ; LED13.A@2048.79,1882.02 LED13.A@2048.79,1973.88 ; LED13.A@2048.79,1973.88 2066.21,1883.69 LED13.A@2048.79,1973.88 ; LED13.A@2048.79,1973.88 2031.37,1883.69 LED13.A@2048.79,1973.88 ; LED13.A@2048.79,1973.88 2135,1974 ; LED13.A@2048.79,1973.88 2048.9,1974 2135,1974 ; LED11.A@2048.79,2398.16 LED11.A@2048.79,2490.03 ; LED11.A@2048.79,2398.16 LED11.A@2066.21,2488.36 ; LED11.A@2048.79,2398.16 LED11.A@2048.79,2490.03 ; LED11.A@2048.79,2490.03 2066.21,2399.83 LED11.A@2048.79,2490.03 ; LED11.A@2048.79,2490.03 2031.37,2399.83 LED11.A@2048.79,2490.03 ; LED9.A@2048.79,2914.3 LED9.A@2048.79,3006.17 ; LED9.A@2048.79,2914.3 LED9.A@2066.21,3004.5 ; LED9.A@2048.79,2914.3 LED9.A@2048.79,3006.17 ; LED9.A@2048.79,3006.17 2066.21,2915.97 LED9.A@2048.79,3006.17 ; LED9.A@2048.79,3006.17 2031.37,2915.97 LED9.A@2048.79,3006.17 ; LED9.A@2048.79,3006.17 2102.83,3006.17 ; LED7.A@2048.79,3811.55 LED7.A@2048.79,3903.41 ; LED7.A@2048.79,3811.55 LED7.A@2066.21,3901.74 ; LED7.A@2048.79,3811.55 LED7.A@2048.79,3903.41 ; LED7.A@2048.79,3903.41 2066.21,3813.22 LED7.A@2048.79,3903.41 ; LED7.A@2048.79,3903.41 2031.37,3813.22 LED7.A@2048.79,3903.41 ; LED5.A@2048.79,4341.08 LED5.A@2048.79,4432.94 ; LED5.A@2048.79,4341.08 LED5.A@2066.21,4431.27 ; LED5.A@2048.79,4341.08 LED5.A@2048.79,4432.94 ; LED5.A@2048.79,4432.94 2066.21,4342.74 LED5.A@2048.79,4432.94 ; LED5.A@2048.79,4432.94 2031.37,4342.74 LED5.A@2048.79,4432.94 ; 2102.83,3006.17 2135,2974 2135,437.92 2122.54,425.46 ; 2108.41,3903.41 2144,3939 2144,4400.88 2111.94,4432.94 ; LED1.A@2388.06,5705.73 LED1.A@2405.48,5795.93 ; LED1.A@2388.06,5705.73 LED1.A@2405.48,5795.93 ; LED1.A@2405.48,5704.07 LED1.A@2405.48,5795.93 ; LED1.A@2405.48,5704.07 LED1.A@2405.48,5795.93 ; LED1.A@2405.48,5795.93 LED1.A@2422.9,5705.73 ; LED1.A@2405.48,5795.93 LED1.A@2681.07,5795.93 ; LED1.A@2663.65,5794.26 LED1.A@2681.07,5704.07 ; LED1.A@2663.65,5794.26 LED1.A@2681.07,5704.07 ; LED1.A@2681.07,5704.07 LED1.A@2681.07,5795.93 ; LED1.A@2681.07,5704.07 LED1.A@2698.49,5794.26 ; LED1.A@2681.07,5704.07 LED1.A@2681.07,5795.93 ; LED1.A@2681.07,5795.93 pad.3@2790,5785 ; LED1.A@2681.07,5795.93 2698.49,5705.73 LED1.A@2681.07,5795.93 ; LED1.A@2681.07,5795.93 2663.65,5705.73 LED1.A@2681.07,5795.93 ; LED1.A@2681.07,5795.93 pad.3@2779.07,5795.93 ; pad.3@2779.07,5795.93 2682.63,5778.5 pad.3@2790,5785 ; pad.3@2779.07,5795.93 2682.63,5813.36 pad.3@2790,5785 ; pad.3@2779.07,5795.93 pad.3@2790,5785 ; pad.3@2790,5785 pad.4@2791,5713 pad.3@2790,5785 ; pad.3@2790,5785 2790,5683 pad.3@2790,5785
XTAL1: C8.1 U1.8 Y1.1 | length 1083.9
  Top Layer w12: U1.8@1522,3264 1605,3264 ; U1.8@1564,3264 1605,3264 ; C8.1@1812.76,3298.69 1826.5,3332.5 ; Y1.1@1819.23,3428.04 1838,3370 ; C8.1@1824.75,3277.11 1770.5,3291 ; C8.1@1824.75,3304.89 1770.5,3291 ; C8.1@1826.5,3296 1826.5,3332.5 ; Y1.1@1831.01,3430.6 1838,3370 ; C8.1@1840.24,3298.69 1826.5,3332.5 ; Y1.1@1844.99,3430.6 1838,3370 ; Y1.1@1856.77,3428.04 1838,3370 ; 1605,3264 1632,3291 C8.1@1826.5,3291 ; 1770.5,3291 C8.1@1826.5,3291 ; C8.1@1826.5,3291 1826.5,3332.5 ; 1826.5,3332.5 1838,3344 1838,3431 1838,3370
XTAL2: C1.1 U1.7 Y1.2 | length 1276.5
  Top Layer w12: U1.7@1522,3232 1625,3232 1638,3245 2059,3245 2070,3256 ; U1.7@1564,3232 1608,3232 ; Y1.2@2019.23,3428.04 2038,3370 ; Y1.2@2031.01,3430.6 2038,3370 ; Y1.2@2044.99,3430.6 2038,3370 ; C1.1@2055.91,3283.62 2070,3256 ; C1.1@2055.9,3300.32 2069.5,3326.5 ; Y1.2@2056.77,3428.04 2038,3370 ; C1.1@2069.5,3287 2070,3256 ; C1.1@2069.5,3292 2069.5,3326.5 ; C1.1@2069.5,3297 2069.5,3326.5 ; C1.1@2070,3292 2070,3256 ; C1.1@2083.1,3300.32 2069.5,3326.5 ; C1.1@2083.19,3284.06 2070,3256 ; 2038,3370 2038,3431 2038,3358 2069.5,3326.5
pads on no net: Mini_S1.0 Mini_S2.0 Mini_S3.0 Mini_S4.0 P1.3 U1.12

## Polygon pours and split planes (outlines as drawn)
GND on Top Layer "GND" (solid, remove dead copper, pour order 3): 20,5800 20,5860 cw(c120,5860) 120,5960 180,5960 2700,5960 cw(c2700,5860) 2800,5860 2800,5720 2800,5700 ccw(c2880,5700) 2880,5620 cw(c2880,5560) 2940,5560 2940,5180 2940,480 cw(c2840,480) 2840,380 2720,380 2560,380 ccw(c2560,280) 2460,280 2460,80 cw(c2400,80) 2400,20 2180,20 880,20 cw(c880,80) 820,80 820,160 820,240 ccw(c760,240) 760,300 520,300 ccw(c520,240) 460,240 460,120 cw(c360,120) 360,20 140,20 120,20 cw(c120,120) 20,120 20,380
GND on Bottom Layer "GND" (solid, remove dead copper, pour order 4): 20,5800 20,5860 cw(c120,5860) 120,5960 180,5960 2700,5960 cw(c2700,5860) 2800,5860 2800,5720 2800,5700 ccw(c2880,5700) 2880,5620 cw(c2880,5560) 2940,5560 2940,5180 2940,480 cw(c2840,480) 2840,380 2720,380 2560,380 ccw(c2560,280) 2460,280 2460,80 cw(c2400,80) 2400,20 2180,20 880,20 cw(c880,80) 820,80 820,160 820,240 ccw(c760,240) 760,300 520,300 ccw(c520,240) 460,240 460,120 cw(c360,120) 360,20 140,20 120,20 cw(c120,120) 20,120 20,380

## Keep-outs
Keep-Out Layer:
  circle w10: c604.33,149.61 r137.8
  circle w10: c604.33,3005.91 r137.8
  circle w10: c600.42,5713.98 r137.8
  circle w10: c2165.35,4724.41 r137.8
  circle w10: c2811.05,144.1 r137.79
  circle w10: c2808.66,5439.01 r137.8
  circle w10: c590.55,4724.41 r137.8
  circle w10: c604.33,149.61 r78.74
  circle w10: c604.33,3005.91 r78.74
  circle w10: c600.42,5713.98 r78.74
  circle w10: c2165.35,4724.41 r78.74
  circle w10: c2811.05,144.1 r78.74
  circle w10: c2808.66,5439.01 r78.74
  circle w10: c590.55,4724.41 r78.74
  lines w5: 0,0 0,5984.25 2952.76,5984.25 2952.76,0 2856,0 0,0

## Silkscreen, mask and mechanical layers (free items; w line width, h text height)
Top Overlay:
  text "远程控制" at 394.76,5412.12 h150
  text "本地控制" at 1993.31,5408.12 h150
  text "开机" at 1719,4692 h150
  text "开机" at 152,4690 h150
  text "值机" at 851,4690 h150
  text "值机" at 2439,4690 h150
  text "电源" at 128.67,4085.57 h150
  text "值机" at 1800.41,4084.69 h150
  text "运行" at 128.78,3559.04 h150
  text "通讯" at 1819,3556 h150
  text "故障" at 128.78,2659.8 h150
  text "缺风" at 1745.77,2657.8 h150
  text "电热高温" at 1708,2152 h150
  text "初效" at 128.67,2147.59 h150
  text "中效" at 128.67,1627.51 h150
  text "预热高温" at 1707.42,1624.59 h150
  text "亚高" at 128.67,1115.31 h150
  text "防冻报警" at 1707.42,1112.78 h150
  text "高效" at 128.67,595.23 h150
  text "防冻停机" at 1711,591 h150
  text "A+B-V G" at 2615,577 h120 r90
  text "消防" at 1814,87 h150
  text "急停" at 128.67,80.66 h150
Bottom Overlay:
  text "CL-KB-V1.2" at 1404,3028 h120
  text "A+B-V G" at 2556,576 h120 r270
Mechanical 1:
  circle w10: c604.33,149.61 r78.74
  circle w10: c604.33,3005.91 r78.74
  circle w10: c600.42,5713.98 r78.74
  circle w10: c2165.35,4724.41 r78.74
  circle w10: c2811.05,144.1 r78.74
  circle w10: c2808.66,5439.01 r78.74
  circle w10: c590.55,4724.41 r78.74
  lines w5: 0,137.8 ccw(c137.8,137.8) 137.8,0 ; 0,5846.46 cw(c137.8,5846.46) 137.8,5984.25 ; 2814.96,0 ccw(c2814.96,137.8) 2952.76,137.8 ; 2814.96,5984.25 cw(c2814.96,5846.46) 2952.76,5846.46 ; 0,0 2856,0 2952.76,0 2952.76,5984.25 0,5984.25 0,0
Drill Drawing:
  text ".Legend" at 3138,93 h120

## Text inside footprints (layer, text, board x,y; h text height)
C2: Top Overlay "+" at 1361,2518 h150 r180
C10: Top Overlay "+" at 2799,1371 h60 r180
LS1: Top Overlay "-" at 878.26,1254.34 h150 r180; Top Overlay "+" at 1178.26,1254.34 h150 r180
P1: Top Overlay "re" at 2619.25,2860.82 h80 r90; Top Overlay "mo" at 2619.25,2629.51 h80 r90; Top Overlay "nc" at 2619.25,2753.65 h80 r90; Top Overlay "ck" at 2619.25,2947.3 h80 r90; Top Overlay "mi" at 2620.01,3041.3 h80 r90; Top Overlay "-" at 2839.7,3124.42 h150 r270; Top Overlay "+" at 2847.58,2651.98 h150 r270